# Altium PCB PCB1.PcbDoc
Units mm, origin at the board's own origin, x right, y up, seen from the top; angles counter-clockwise.
Board outline 36.25 x 45 mm, 2 copper layers (Top Layer, Bottom Layer); 13 components, 9 nets, 42 pads, 8 vias.
Unrouted connection lines stored in the file: 1.
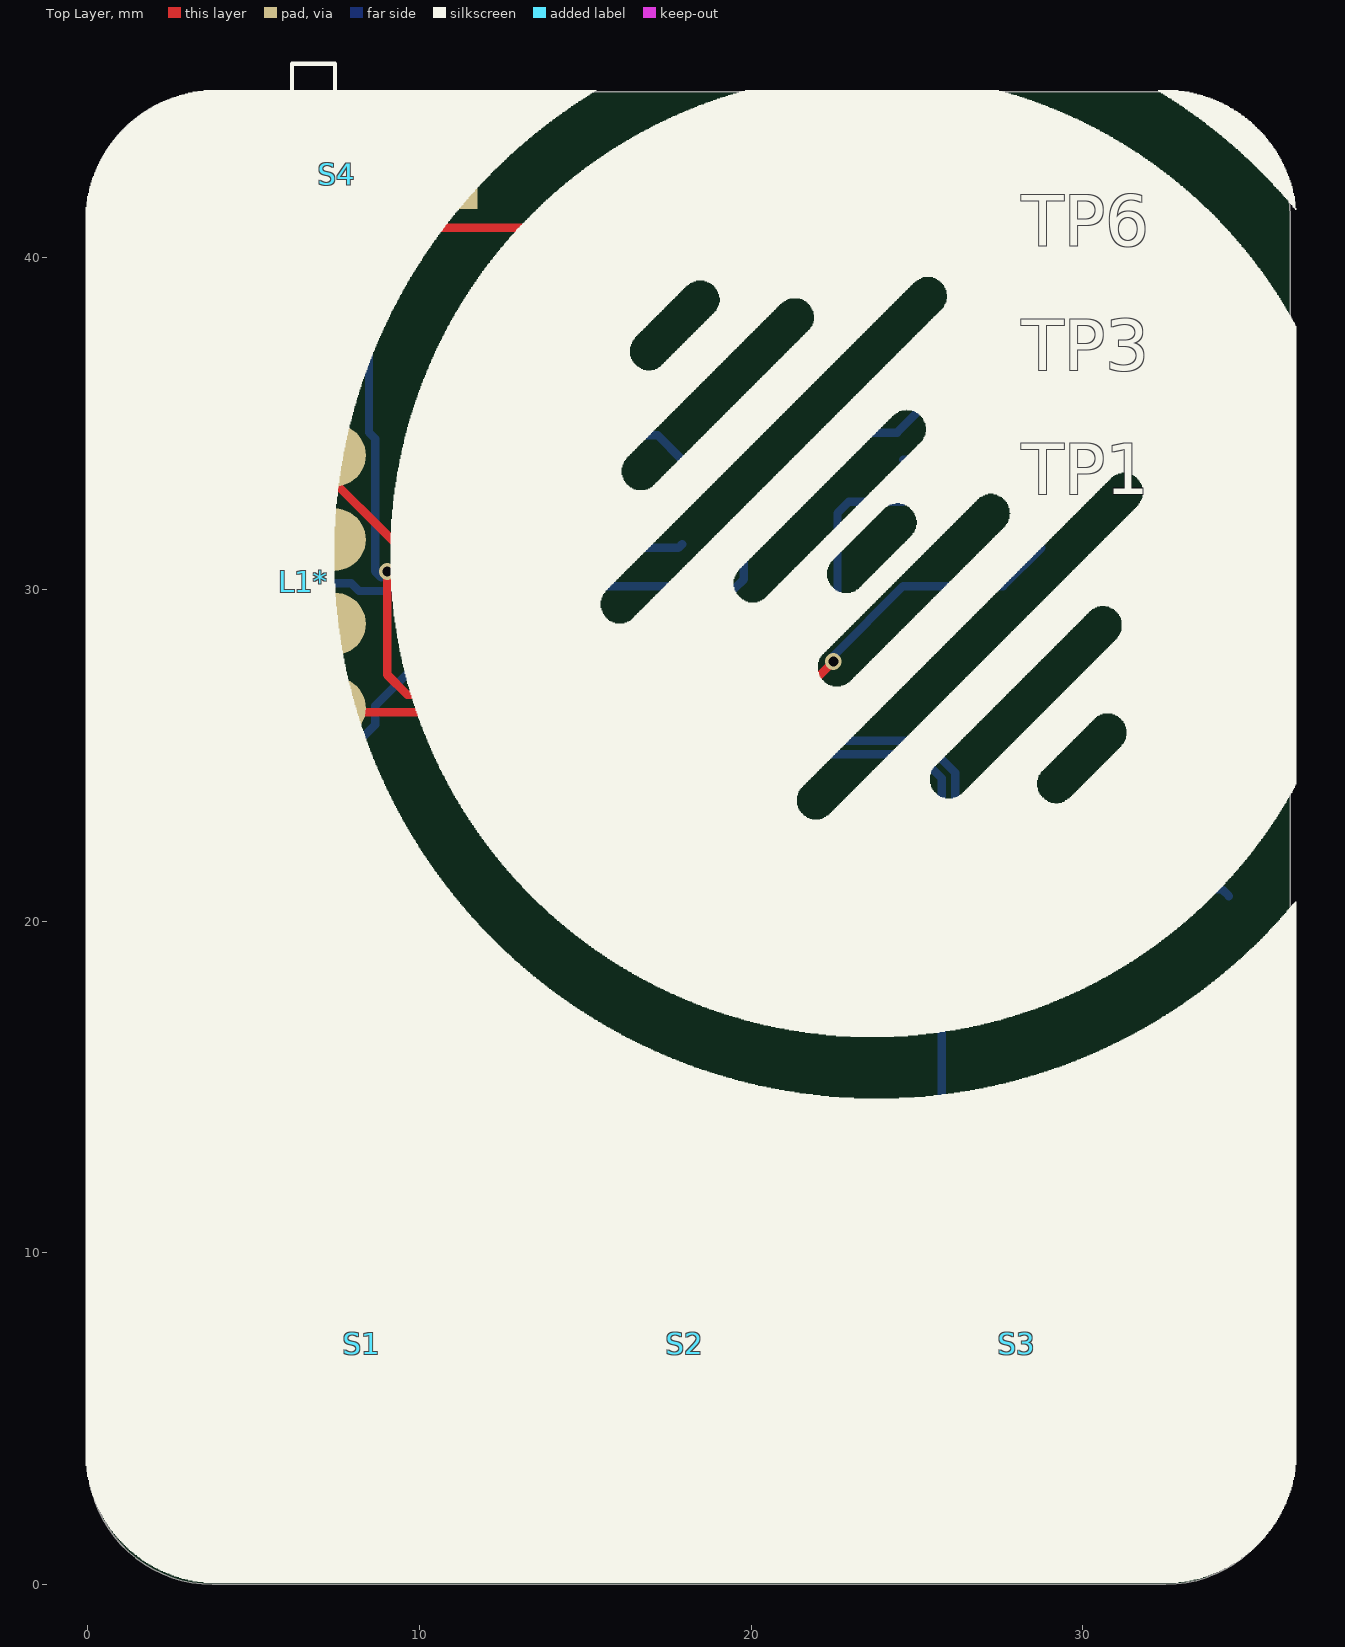
[diagram p0: Top Layer view]
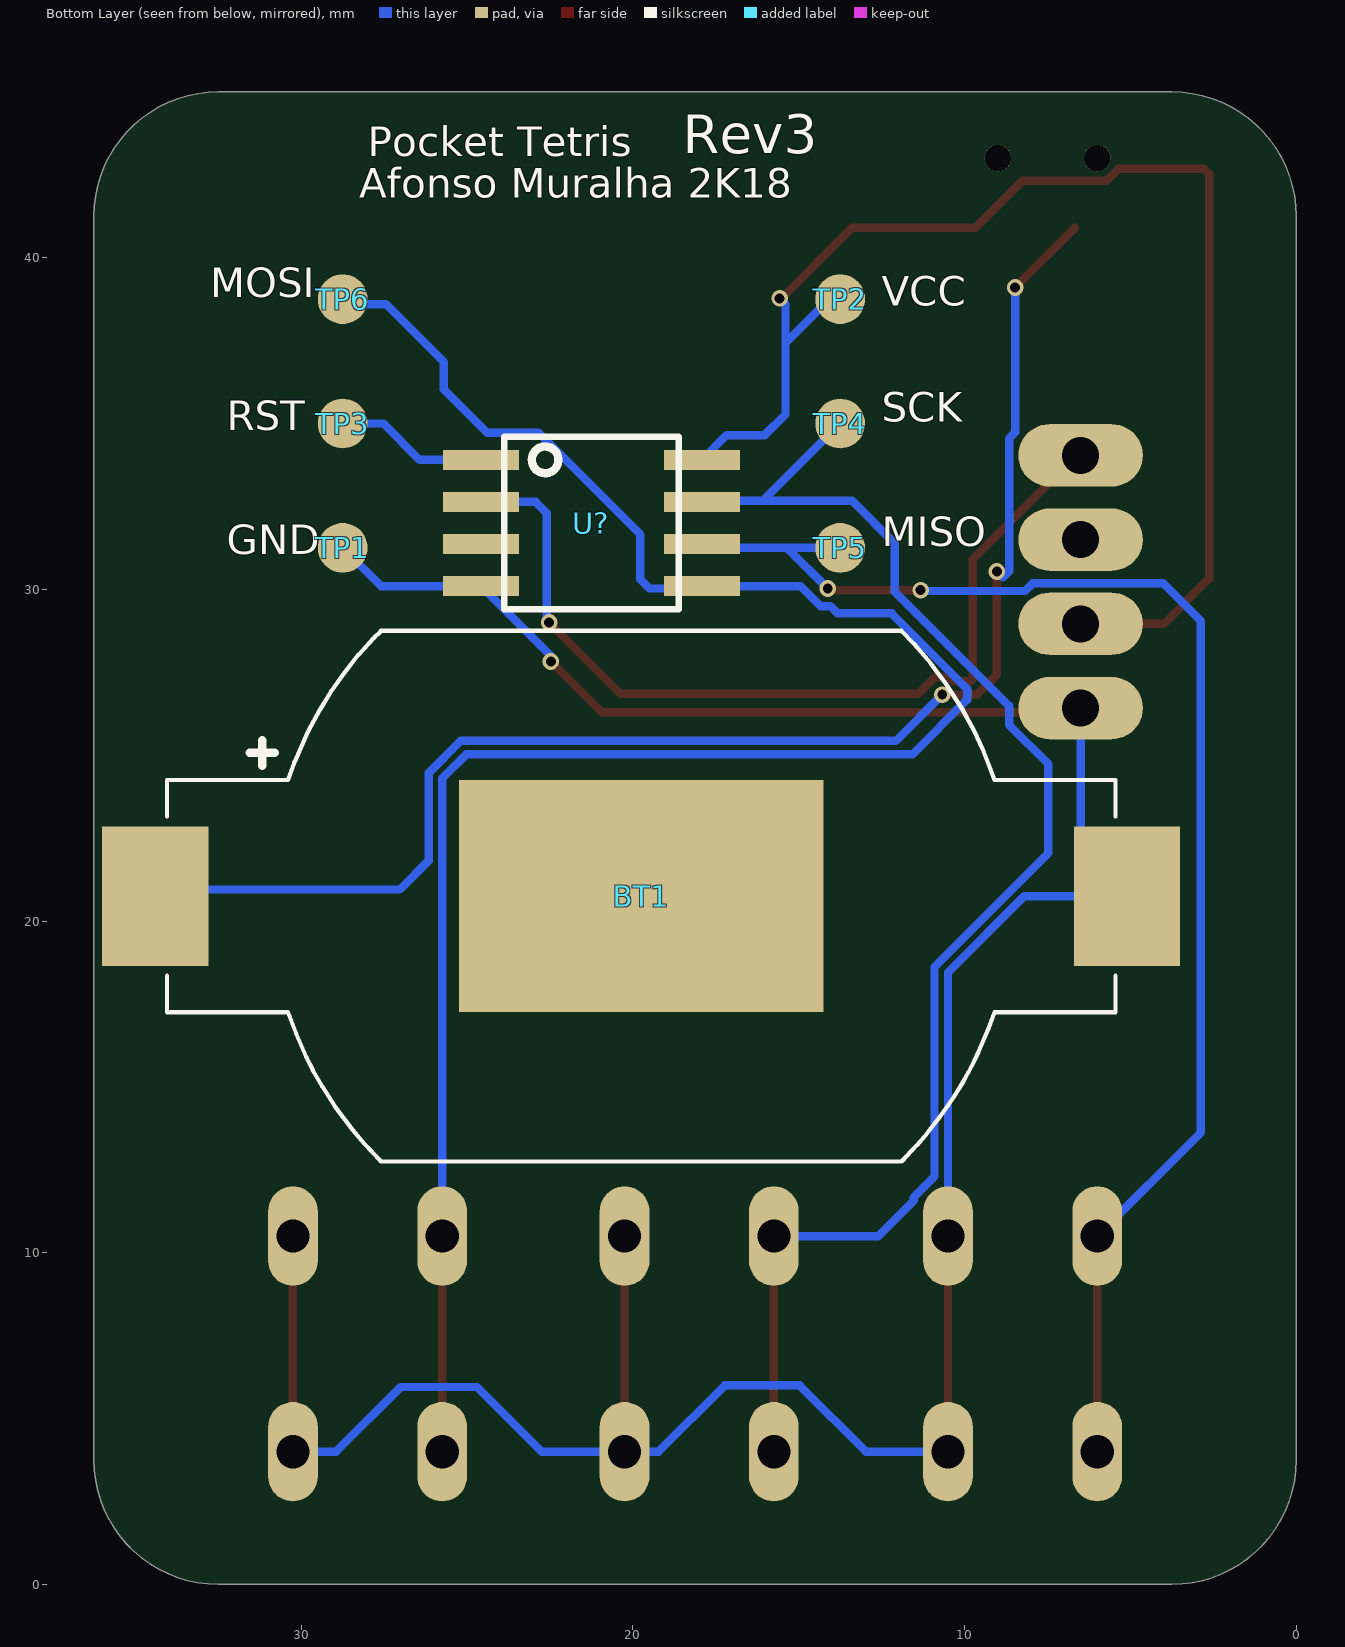
[diagram p1: Bottom Layer view, seen from below]
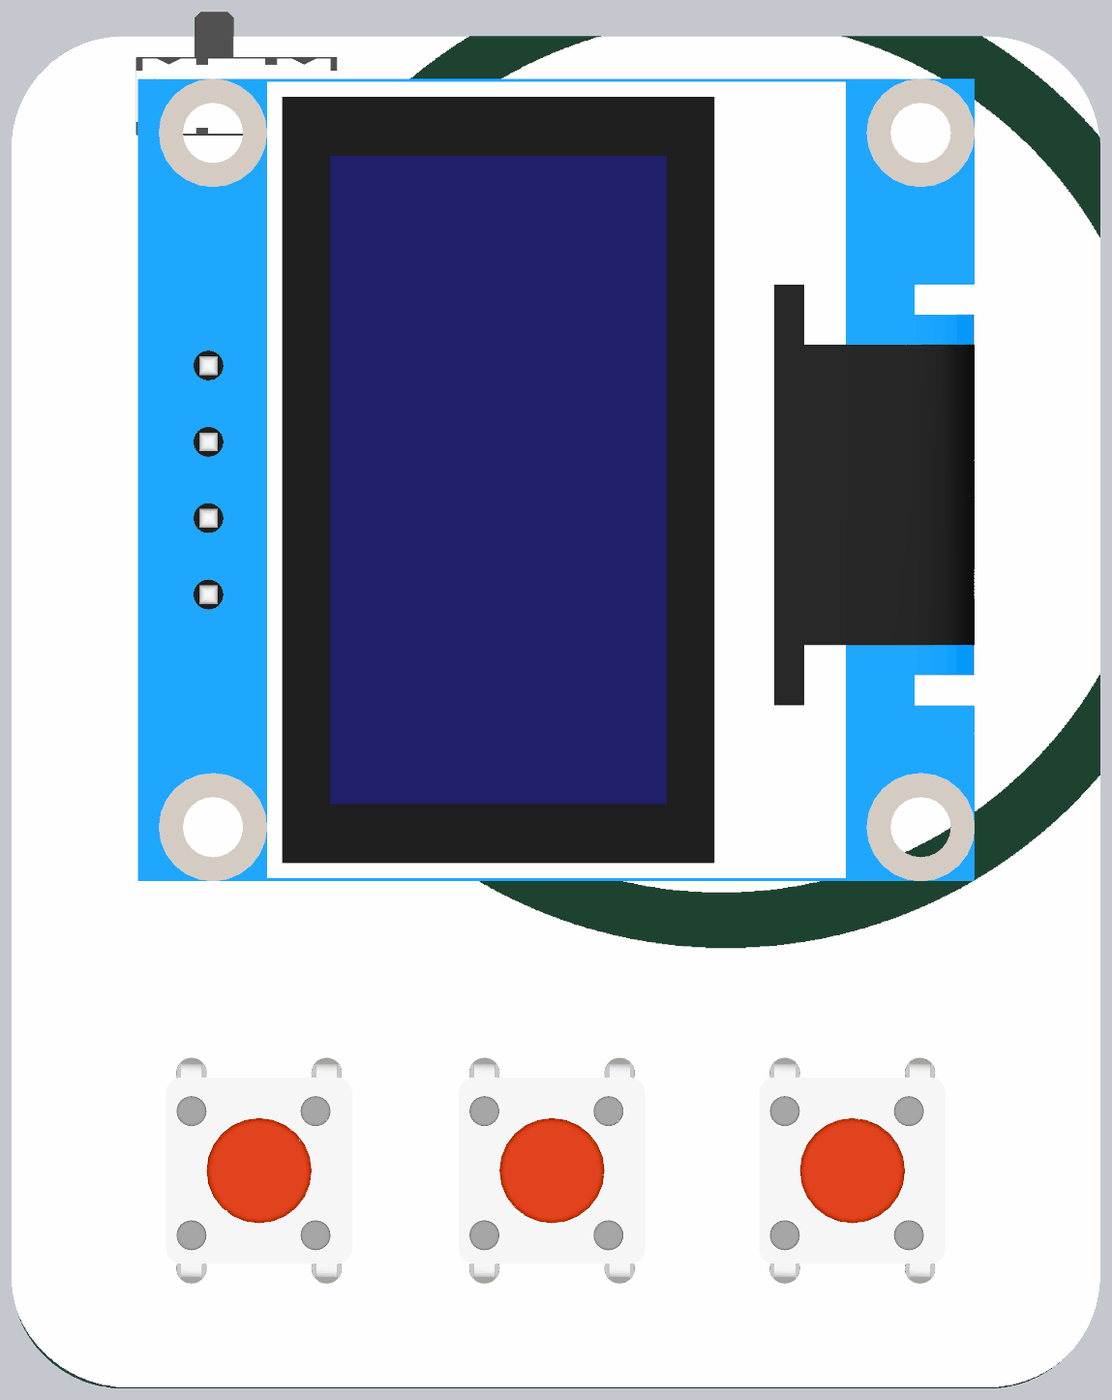
[diagram p2: 3D render of the assembled board from above, using the file's embedded part models]

## Layer stack, top to bottom
Top Solder: solder mask 0.0102, Solder Resist, Dk 3.5
Top Layer: signal copper 0.0356
Dielectric 1: dielectric 0.32, FR-4, Dk 4.8
Bottom Layer: signal copper 0.0356
Bottom Solder: solder mask 0.0102, Solder Resist, Dk 3.5

## Board outline
3.75,0 cw(c3.75,3.75) 0,3.75 0,41.25 cw(c3.75,41.25) 3.75,45 32.5,45 cw(c32.5,41.25) 36.25,41.25 36.25,3.75 cw(c32.5,3.75) 32.5,0

## Design rules (kind name [scope] priority, off if disabled: settings)
Clearance Clearance_1 [All] p1: gap=0.152 ignorepadtopadclearanceinfootprint=TRUE
Clearance [All] p2: gap=0.152 ignorepadtopadclearanceinfootprint=TRUE
ComponentClearance ComponentClearance_1 [InComponent('BT1')] p1: gap=-0.25 collisioncheckmode=3 verticalgap=2540 showdistances=FALSE
ComponentClearance [InComponent('D1')] p2: gap=-0.025 collisioncheckmode=3 verticalgap=2540 showdistances=TRUE
PolygonConnect [All] p1: connectstyle=Relief reliefconductorwidth=0.254 reliefentries=4 polygonreliefangle="90 Angle" airgapwidth=0.254
RoutingVias [All] p1: holewidth=0.3 width=0.5 viastyle="Through Hole" minholewidth=0.3 minwidth=0.5 maxholewidth=0.3 maxwidth=0.5
SolderMaskExpansion [All] p1: expansion=0.102
Width [All] p1: maxlimit=0.254 minlimit=0.254 preferedwidth=0.254
29 further rules are at their usual default settings.

## Components (designator, comment, footprint, x,y, rotation, side; value= is the part's Value field where it differs from the comment)
BT1 "" "CR2032 Holder _ \"White\"" 19.75,20.75 r180 bottom locked
L1* "OLED I2C 0.96' 128X64" "OLED I2C 0.96' 128X64" 6.5,26.42 r90 top locked
S1 "DTS-6" DTS-6 8.25,7.25 r90 top locked
S2 "DTS-6" DTS-6 18,7.25 r90 top locked
S3 "DTS-6" DTS-6 28,7.25 r90 top locked
S4 "" MSK-12C02 7.5,43 r180 top
TP1 "Test pad" TP15R#1 28.75,31.25 r0 top
TP2 "Test pad" TP15R#1 13.75,38.75 r90 top
TP3 "Test pad" TP15R#1 28.75,35 r90 top
TP4 "Test pad" TP15R#2 13.75,35 r90 bottom
TP5 "Test pad" TP15R#2 13.75,31.25 r90 bottom
TP6 "Test pad" TP15R#1 28.75,38.75 r90 top
U? "ATMEL ATtiny 85" ATTINY85 21.25,32 r270 bottom

## Footprints (in the part's own frame and the unit in brackets; to place one, negate y for a bottom-side part, rotate by r counter-clockwise, add the part's x,y. Pads: shape width x height; smd on the part's side, far side on the other; paste and mask are expansions set on the pad)
ATTINY85 [mil]
  rect 23.62x90 smd: 1(-75,-131.1) 2(-25,-131.1) 3(25,-131.1) 4(75,-131.1) 5(75,131.1) 6(25,131.1) 7(-25,131.1) 8(-75,131.1)
  silkscreen extent -102,-104 102,104
"CR2032 Holder _ \"White\"" [mm]
  rect 3.2x4.2 smd: 1(-14.65,0) 2(14.65,0)
  rect 11x7 smd: 3(0,0)
  silkscreen extent -14.3,-8 14.3,8, body extent -16.1,-8 16.1,8, height 5.6
DTS-6 [mm]
  oval 3x1.5 hole 1: 1(-3.25,2.25) 2(3.25,2.25) 3(-3.25,-2.25) 4(3.25,-2.25)
  silkscreen extent -3.1,-3.1 3.1,3.1, body extent -3.95,-3.1 3.95,3.1, height 7
MSK-12C02 [mil]
  round 31.5 hole 31.5: 1(-59.06,0) 1(59.06,0)
  rect 31.5x78.74 smd: COM(32.4,82.68) L1(91.46,82.68) L2(-85.71,82.68)
  rect 39.37x31.5 smd: GND@1(-147.64,-44.29) GND@4(147.64,-44.29)
  rect 35.43x31.5 smd: GND@2(-149.61,44.29) GND@3(149.61,44.29)
  silkscreen extent -132,-112 132,53, body extent -152,-110 152,87, height 46
"OLED I2C 0.96' 128X64" [mil]
  oval 74x148 hole 44: 1(0,0) 2(100,0) 3(200,0) 4(300,0)
  silkscreen extent -370,-25 675,95, body extent -376,-1007 676,90, height 176
TP15R#1 [mm]
  rrect100% 1.5x1.5 smd far side paste-0.75: TP(0,0)
TP15R#2 [mm]
  rrect100% 1.5x1.5 smd paste-0.75: TP(0,0)

## Part data
BT1: library part BU2032SM-BT-GTR, PACKAGE=None, Availability=Good, MF=MPD, MP=BU2032SM-BT-GTR, Price="0.64 USD"
S4: library part MSK-12C02_SMD_SPDT_SWITCH
TP1 TP2 TP3 TP4 TP5 TP6: library part TPTP15R
U?: library part ATTINY85SU

## Via types
v1: diameter 0.5, hole 0.3, Top Layer to Bottom Layer, 8 vias

## Nets (pads, with @x,y where several pads share a name; then routed paths per layer and width w, separated by ;. In a path a pad name is that pad's centre, name@x,y a point inside that pad or via, vN(x,y) a via of type N, cw(c..) or ccw(c..) an arc to the next point about the centre after c; other vN are vias at no path point)
GND: BT1.2 L1*.1 S1.3 S1.4 S2.3 S2.4 S3.3 S3.4 TP1.TP U?.4 | length 87.5
  Top Layer w0.254: L1*.1 6.623,26.297 20.947,26.297 v1(22.475,27.825) ; S1.3 S1.4 ; S2.3 S2.4 ; S3.3 S3.4
  Bottom Layer w0.254: L1*.1 6.5,22.15 BT1.2 8.2,20.75 10.5,18.45 S1.4 ; S1.3 12.975,4 14.975,6 17.225,6 19.225,4 S2.3 22.75,4 24.7,5.95 27,5.95 28.95,4 S3.3 ; v1(22.475,27.825) 22.475,27.99 U?.4 27.595,30.095 TP1.TP
Left: S1.1 S1.2 TP5.TP U?.6 | length 44.2
  Top Layer w0.254: S1.1 S1.2 ; v1(11.325,29.975) 14.175,29.975 v1(14.125,30.025)
  Bottom Layer w0.254: S1.2 2.875,13.625 2.875,29.05 4.004,30.179 7.945,30.179 8.174,29.95 11.3,29.95 v1(11.325,29.975) ; TP5.TP 15.35,31.25 ; v1(14.125,30.025) 15.35,31.25 ; U?.6 17.805,31.25 15.35,31.25
Middle: S2.1 S2.2 TP4.TP U?.7 | length 44.2
  Top Layer w0.254: S2.1 S2.2
  Bottom Layer w0.254: TP4.TP 16.075,32.675 ; S2.2 12.6,10.5 11.529,11.571 11.529,11.676 10.906,12.299 10.906,18.618 7.475,22.05 7.475,24.731 8.659,25.915 8.659,26.484 12.1,29.925 12.1,31.375 13.4,32.675 16.075,32.675 ; U?.7 17.88,32.675 16.075,32.675
MOSI: S3.1 S3.2 TP6.TP U?.5 | length 62.5
  Top Layer w0.254: S3.1 S3.2
  Bottom Layer w0.254: S3.2 25.75,24.3 25.025,25.025 11.575,25.025 9.925,26.675 9.925,27 12.2,29.275 13.825,29.275 14.046,29.496 14.344,29.496 14.944,30.095 U?.5 17.99,30.025 19.5,30.025 19.775,30.3 19.775,31.65 22.85,34.725 24.4,34.725 25.7,36.025 25.7,36.85 27.45,38.6 28.6,38.6 TP6.TP
NetBT1_1: BT1.1 S4.COM | length 44.5
  Top Layer w0.254: S4.COM v1(8.475,39.102) ; v1(9.025,30.538) 9.025,27.425 9.624,26.826 v1(10.674,26.826)
  Bottom Layer w0.254: v1(8.475,39.102) 8.475,34.729 8.659,34.545 8.659,30.541 8.844,30.356 v1(9.025,30.538) ; v1(10.674,26.826) 12.069,25.431 25.193,25.431 26.156,24.468 26.156,21.819 27.025,20.95 34.2,20.95 BT1.1
RST: TP3.TP U?.1 | length 4.6
  Bottom Layer w0.254: U?.1 26.43,33.905 27.525,35 TP3.TP
SCL: L1*.3 U?.3
SDA: L1*.4 U?.2 | length 27.6
  Top Layer w0.254: L1*.4 6.624,34.04 9.75,30.914 9.75,27.3 9.817,27.233 10.331,27.233 10.454,27.356 10.893,27.356 11.399,26.85 20.375,26.85 v1(22.525,29)
  Bottom Layer w0.254: v1(22.525,29) 22.6,29.075 22.6,32.3 22.935,32.635 U?.2
VCC: L1*.2 S4.L2 TP2.TP U?.8 | length 40.1
  Top Layer w0.254: L1*.2 3.99,28.96 2.625,30.325 2.625,42.525 2.775,42.675 5.364,42.675 5.718,42.321 8.256,42.321 S4.L2 13.4,40.9 15.525,38.775 v1(15.575,38.775)
  Bottom Layer w0.254: TP2.TP 14.075,38.75 15.4,37.425 ; v1(15.575,38.775) 15.4,38.6 15.4,37.425 ; U?.8 17.175,34.65 16.025,34.65 15.4,35.275 15.4,37.425
pads on no net: BT1.3 S4.1 S4.GND@1 S4.GND@2 S4.GND@3 S4.GND@4 S4.L1

## Silkscreen, mask and mechanical layers (free items; w line width, h text height)
Top Overlay:
  drawing of 5331 lines, arcs and shapes, not listed
Bottom Overlay:
  text "Rev3" at 18.5,42.75 h2
  text "Pocket Tetris" at 28,42.75 h1.52
  text "Afonso Muralha 2K18" at 28.25,41.5 h1.52
  text "MOSI" at 32.75,38.5 h1.52
  text "VCC" at 12.5,38.25 h1.52
  text "SCK" at 12.5,34.75 h1.52
  text "RST" at 32.25,34.5 h1.52
  text "MISO" at 12.5,31 h1.52
  text "GND" at 32.25,30.75 h1.52
Mechanical 2:
  pour cut-out: -0.025,3.575 -0.025,41.575 cw(c3.475,41.575) 3.475,45.075 32.475,45.075 cw(c32.6,41.45) 36.225,41.575 36.225,3.825 cw(c32.725,3.575) 32.975,0.075 3.475,0.075 cw(c3.475,3.575)
  pour cut-out: 3.385,45
  pour cut-out: -0.025,3.1 -0.025,41.1 cw(c3.475,41.1) 3.475,44.6 32.475,44.6 cw(c32.6,40.975) 36.225,41.1 36.225,3.35 cw(c32.725,3.1) 32.975,-0.4 3.475,-0.4 cw(c3.475,3.1)
  lines w0.254: 0,3.5 ccw(c3.5,3.5) 3.5,0 33,0 ccw(c32.75,3.5) 36.25,3.75 36.25,41.5 ccw(c32.625,41.375) 32.5,45 3.5,45 ccw(c3.5,41.5) 0,41.5 0,3.5
  text "size in mm" at 0,51 h2
  text "corners are round" at 9.5,51 h2
  text "PCB Edge" at 0,0 h0.5

## Dimensions
0,45 to 0,0 on Mechanical 2
0,45.25 to 36.25,46.25 on Mechanical 2